# EAGLE board TRV_MRF49_U_V1.1_BF (EAGLE 6.3)
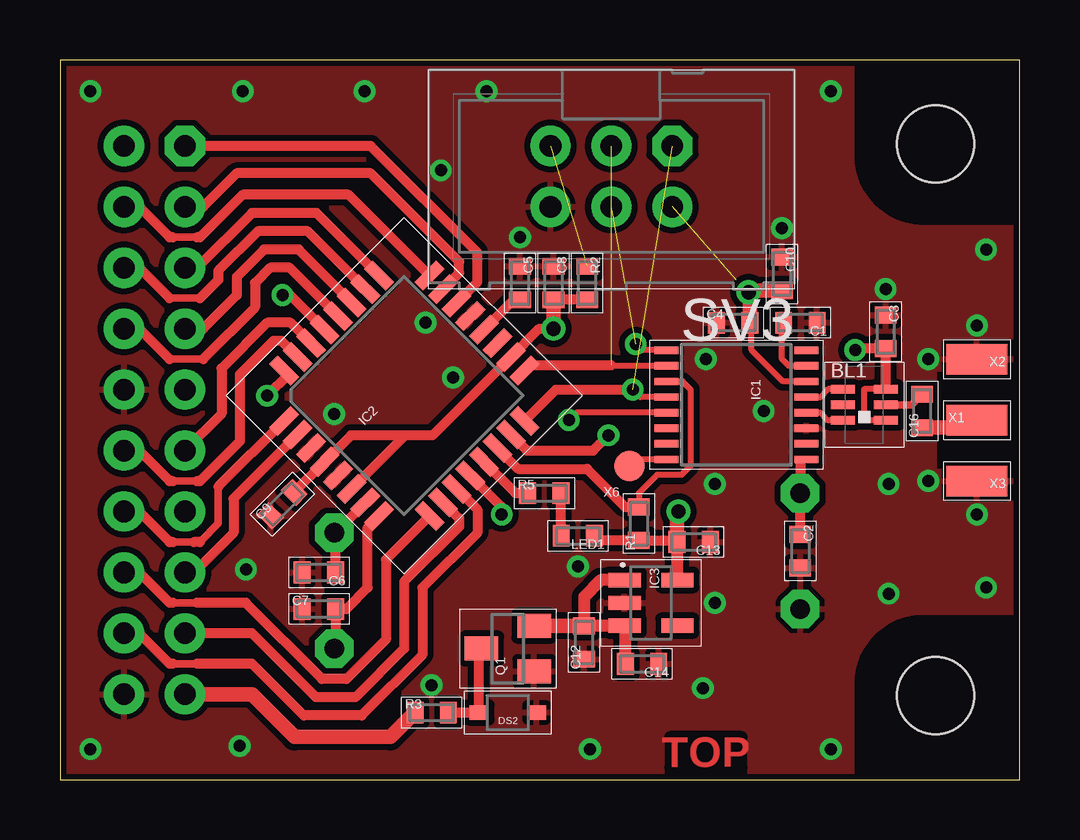
[diagram p0: board, top side]
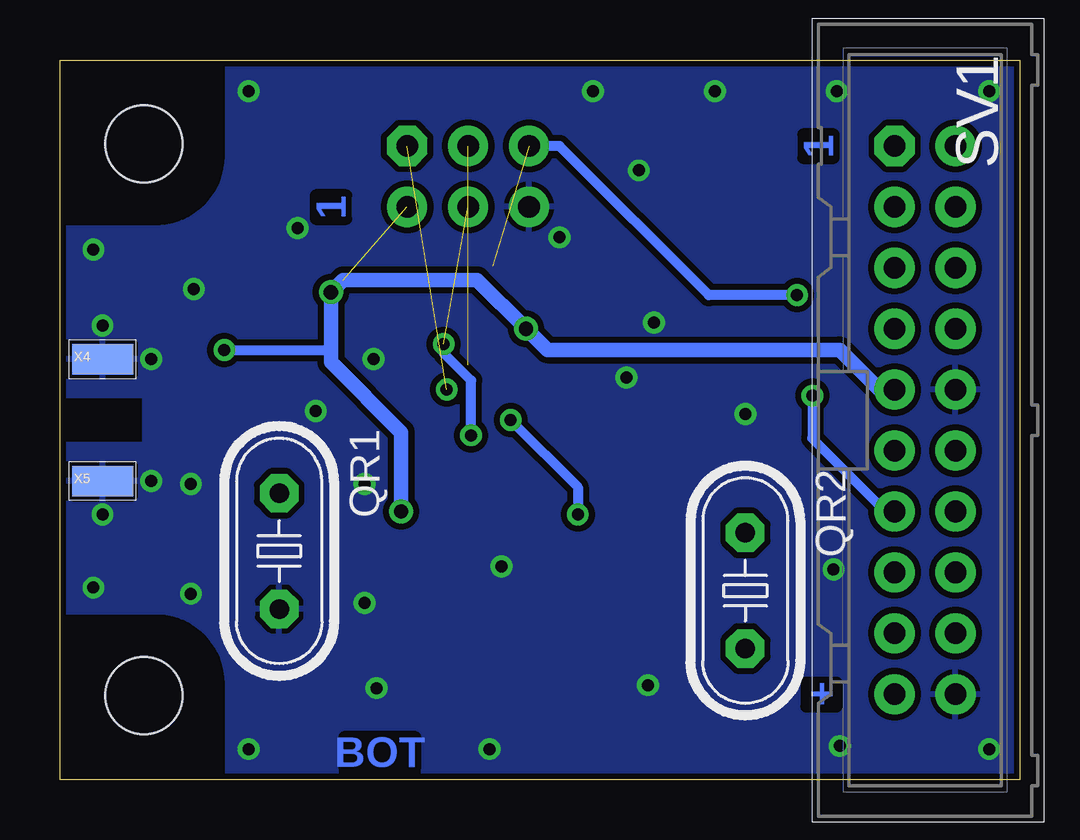
[diagram p1: board, bottom side, seen from below]

Size 40 x 30 mm. Coordinates in mm from the lower left corner, seen from the top.
Outline: 0,0 40,0 40,30 0,30 0,0
Copper layers (1*16): Top 0.035mm / dielectric 1.5mm / Bottom 0.035mm
Design rules "default *": minimum track width 8mil, minimum drill 0.3mm, track to track 10mil, track to pad 10mil, pad to pad 10mil, via to via 10mil, smd to smd 10mil, copper to edge 10mil, drill to drill 8mil, minimum pad ring 5mil, minimum via ring 8mil, stop-mask expansion 4mil, vias tented up to drill 25mil, thermal gap 8mil
Holes 3.2 mm at 36.5,26.5 36.5,3.5

## Footprints (pad centres in the part's own frame; a part is rotated, then mirrored left to right if it is on the bottom)
BL = smd 1 x 0.35: 1 0.9,-0.65; 2 0.9,0; 3 0.9,0.65; 4 -0.9,0.65; 5 -0.9,0; 6 -0.9,-0.65
0603 = smd 0.7 x 0.9: 1 -0.697,0; 2 0.697,0
SOD323 = smd 0.8 x 0.6: A 1.2,0; C -1.2,0
TSSOP16 = smd 0.305 x 0.991: 1 -2.275,-2.918; 2 -1.625,-2.918; 3 -0.975,-2.918; 4 -0.325,-2.918; 5 0.325,-2.918; 6 0.975,-2.918; 7 1.625,-2.918; 8 2.275,-2.918; 9 2.275,2.918; 10 1.625,2.918; 11 0.975,2.918; 12 0.325,2.918; 13 -0.325,2.918; 14 -0.975,2.918; 15 -1.625,2.918; 16 -2.275,2.918
TQFP32-08 = smd 1.27 x 0.5: 1 -4.293,2.8; 2 -4.293,2; 3 -4.293,1.2; 4 -4.293,0.4; 5 -4.293,-0.4; 6 -4.293,-1.2; 7 -4.293,-2; 8 -4.293,-2.8; 17 4.293,-2.8; 18 4.293,-2; 19 4.293,-1.2; 20 4.293,-0.4; 21 4.293,0.4; 22 4.293,1.2; 23 4.293,2; 24 4.293,2.8 | smd 0.5 x 1.27: 9 -2.8,-4.293; 10 -2,-4.293; 11 -1.2,-4.293; 12 -0.4,-4.293; 13 0.4,-4.293; 14 1.2,-4.293; 15 2,-4.293; 16 2.8,-4.293; 25 2.8,4.293; 26 2,4.293; 27 1.2,4.293; 28 0.4,4.293; 29 -0.4,4.293; 30 -1.2,4.293; 31 -2,4.293; 32 -2.8,4.293
SOT23-5 = smd 0.6 x 1.35: 1 -0.95,-1.101; 2 0,-1.101; 3 0.95,-1.101; 4 0.95,1.101; 5 -0.951,1.101
SOT23 = smd 1 x 1.4: 1 -0.95,-1.1; 2 0.95,-1.1; 3 0,1.1
HC49U-V = drill 0.813 pad 1.6 octagon: 1 -2.413,0; 2 2.413,0
ML20 = drill 0.9 pad 1.676 octagon: 1 -11.43,-1.27 | drill 0.9 pad 1.676: 2 -11.43,1.27; 3 -8.89,-1.27; 4 -8.89,1.27; 5 -6.35,-1.27; 6 -6.35,1.27; 7 -3.81,-1.27; 8 -3.81,1.27; 9 -1.27,-1.27; 10 -1.27,1.27; 11 1.27,-1.27; 12 1.27,1.27; 13 3.81,-1.27; 14 3.81,1.27; 15 6.35,-1.27; 16 6.35,1.27; 17 8.89,-1.27; 18 8.89,1.27; 19 11.43,-1.27; 20 11.43,1.27
ML6 = drill 0.9 pad 1.676 octagon: 1 -2.54,-1.27 | drill 0.9 pad 1.676: 2 -2.54,1.27; 3 0,-1.27; 4 0,1.27; 5 2.54,-1.27; 6 2.54,1.27
S2.54/1.27 = smd 1.27 x 2.54: 1 0,0
S1.27R = smd 1.27 x 1.27: 1 0,0

## Placement (x,y rotation side)
BL1  [BL]  33.53,15.62 0 top
C1  4n7  [0603]  30.86,19.05 180 top
C2  n.b.  [0603]  30.86,9.53 270 top
C3  47p  [0603]  34.42,18.67 270 top
C4  100n  [0603]  28.07,19.05 0 top
C5  100n  [0603]  19.18,20.7 270 top
C6  22p  [0603]  10.79,8.64 180 top
C7  22p  [0603]  10.79,7.11 0 top
C8  100n  [0603]  20.57,20.7 270 top
C9  100n  [0603]  9.27,11.48 45 top
C10  1u  [0603]  30.1,21.08 270 top
C12  1u  [0603]  21.84,5.71 90 top
C13  1u  [0603]  26.42,9.91 180 top
C14  100n  [0603]  24.27,4.82 180 top
C16  27p  [0603]  35.94,15.37 90 top
DS2  PESD12VL1BA  [SOD323]  18.67,2.79 180 top
IC1  MRF49XA  [TSSOP16]  28.19,15.62 270 top
IC2  MEGA168PA-AU  [TQFP32-08]  14.35,16 45 top
IC3  LP2992-IM5-3.3  [SOT23-5]  24.64,7.37 270 top
LED1  LEDR  [0603]  21.59,10.16 180 top
Q1  IRLM9301  [SOT23]  18.67,5.46 90 top
QR1  10.000  [HC49U-V]  30.86,9.53 270 bottom
QR2  16.000  [HC49U-V]  11.43,7.87 270 bottom
R1  10k  [0603]  24.13,10.67 90 top
R2  10k  [0603]  21.97,20.7 270 top
R3  0R  [0603]  15.49,2.79 0 top
R5  330R  [0603]  20.19,11.94 0 top
SV1  ISP  [ML20]  3.94,14.99 270 bottom
SV3  ISP  [ML6]  22.99,25.15 180 top
X1  ANT  [S2.54/1.27]  38.23,14.99 270 top
X2  GND  [S2.54/1.27]  38.23,17.53 90 top
X3  GND  [S2.54/1.27]  38.23,12.45 90 top
X4  GND  [S2.54/1.27]  38.23,17.53 270 bottom
X5  GND  [S2.54/1.27]  38.23,12.45 270 bottom
X6  [S1.27R]  23.75,13.08 0 top

## Library data of the parts
BL1 = RF
C1-C10 C12-C14 C16 R1-R3 R5 = RCL
DS2 = Diode
IC1 = Other
IC2 = atmel
IC3 = DCDC
LED1 = Optic
Q1 = Transistor
QR1 QR2 = QUARTZ
SV1 SV3 X1-X6 = Conn

## Nets
+3V3: BL1.1 BL1.3 C3.2 C4.2 C8.2 C9.2 C10.2 C13.2 IC1.14 IC2.4 IC2.6 IC2.18 IC3.5 LED1.1 R1.1 R2.2 SV1.9 SV3.2
CTS: IC2.10 SV1.17
GND: C1.1 C2.2 C3.1 C4.1 C5.1 C6.2 C7.1 C8.1 C9.1 C10.1 C12.1 C13.1 C14.1 DS2.C IC1.11 IC2.3 IC2.5 IC2.21 IC3.2 Q1.1 QR1.2 SV1.10 SV1.20 SV3.6 X2.1 X3.1 X4.1 X5.1
LED: IC2.13 R5.1
MISO: IC1.4 IC2.16 SV3.1
MOSI: IC1.1 IC2.15 SV3.4
N$1: IC1.8 X6.1
N$2: BL1.4 IC1.13
N$3: IC2.22 SV1.1
N$4: C2.1 IC1.9 QR1.1
N$5: DS2.A Q1.3 R3.2
N$6: C5.2 IC2.20
N$7: BL1.6 IC1.12
N$8: BL1.2 C16.2
N$12: C12.2 C14.2 IC3.1 IC3.3 Q1.2
N$18: C6.1 IC2.7 QR2.1
N$19: C7.2 IC2.8 QR2.2
N$21: LED1.2 R5.2
N$23: R3.1 SV1.19
N$25: C16.1 X1.1
PC0: IC2.23 SV1.3
PC1: IC2.24 SV1.4
PC2: IC2.25 SV1.5
PC3: IC2.26 SV1.6
PC4: IC2.27 SV1.7
PC5: IC2.28 SV1.8
PD2: IC2.32 SV1.13
PD3: IC2.1 SV1.14
PD4: IC2.2 SV1.15
PD5: IC2.9 SV1.16
PD7: IC2.11 SV1.18
RIRQ: IC1.5 IC2.12
RSEL: IC1.3 IC2.14 R1.2
RSSI: C1.2 IC1.15
RST: IC2.29 R2.1 SV3.5
RXD: IC2.30 SV1.11
SCK: IC1.2 IC2.17 SV3.3
TXD: IC2.31 SV1.12

## Tracks (layer width: path | path; a pad name or v marks a point on that pad's centre or on a via)
+3V3  (via drill 0.5, 0.6)  (1 unrouted)
  Top 0.254: IC1.14 30.14,16.6 28.83,17.91 28.83,18.98 C4.2 | BL1.1 33.53,14.97 33.53,16.27 BL1.3
  Top 0.305: BL1.3 34.43,16.37 34.42,16.38
  Top 0.406: C9.2 IC2.4 12.13,14.35 14.35,14.35 | 14.35,14.35 15.53,14.35 IC2.18 19.97,18.8 v20.57,18.8 | IC2.6 14.35,14.3 14.35,14.35 | R2.2 C8.2 | LED1.1 22.48,9.97 R1.1 25.65,9.97 C13.2 | 34.42,16.38 C3.2 33.21,17.97 v33.15,17.91
  Top 0.508: C13.2 25.72,8.34 IC3.5
  Top 0.61: C8.2 v20.57,18.8 | C10.2 28.77,20.39 v28.7,20.32 28.76,20.26 C4.2 | C13.2 25.72,11.11 v25.78,11.18
  Bottom 0.406: v33.15,17.91 28.7,17.91
  Bottom 0.61: SV1.9 5.84,16.26 7.49,17.91 19.68,17.91 v20.57,18.8 22.61,20.83 28.19,20.83 v28.7,20.32 28.7,17.91 28.7,17.4 25.78,14.48 v25.78,11.18
CTS
  Top 0.406: IC2.10 16.64,10.89 16.64,10.54 14.35,8.26 14.35,5.46 12.32,3.43 10.67,3.43 8,6.1 SV1.17
GND  (via drill 0.5)
  other vias: 7.75,8.76 21.59,8.89 38.23,18.92 38.23,11.05 22.1,1.27 34.54,12.32 36.2,12.45 36.2,17.53 7.62,28.7 12.7,28.7 17.78,28.7 32.13,28.7 30.1,22.99 38.61,22.1 38.61,8 32.13,1.27 26.8,3.81 34.42,20.45 15.88,25.4 34.54,7.75 15.49,3.94 7.49,1.4 27.3,7.37 27.3,12.32 19.18,22.61 29.34,15.37 26.92,17.53 11.43,15.24 16.38,16.76 15.24,19.05 1.27,28.7 1.27,1.27
  pour Top: 0,0 33,0 33,4 arc-90 36,7 40,7 40.01,12.83 36.45,12.83 36.45,17.14 40,17.14 40,23 36,23 arc-90 33,26 33,30 0,30
  pour Bottom: 0,0 33,0 33,4 arc-90 36,7 40,7 40.01,13.97 36.45,13.97 36.45,16 40,16 40,23 36,23 arc-90 33,26 33,30 0,30
LED
  Top 0.406: IC2.13 18.98,11.94 R5.1
MISO  (via drill 0.5)  (1 unrouted)
  Top 0.254: IC1.4 24.19,15.95 v23.88,16.26
  Top 0.406: IC2.16 20.68,16.26 v23.88,16.26
MOSI  (via drill 0.5)  (1 unrouted)
  Top 0.254: IC1.1 24.27,17.9 v24,18.16
  Top 0.406: IC2.15 19.46,13.72 22.23,13.72 v22.86,14.35
  Bottom 0.406: v22.86,14.35 22.86,16.64 24,17.78 v24,18.16
N$1
  Top 0.254: IC1.8 24.01,13.35 X6.1
N$2
  Top 0.254: IC1.13 31.69,15.95 32.02,16.27 BL1.4
N$3
  Top 0.406: IC2.22 17.4,20.75 17.4,21.97 12.95,26.42 SV1.1
N$4
  Top 0.254: IC1.9 31,13.35 30.86,13.21
  Top 0.406: C2.1 QR1.1 30.86,13.21
N$5
  Top 0.406: R3.2 DS2.A 17.47,5.36 Q1.3
N$6
  Top 0.406: IC2.20 18.92,20 C5.2
N$7
  Top 0.254: IC1.12 31.69,15.3 32.02,14.97 BL1.6
N$8
  Top 0.305: BL1.2 35.5,15.62 C16.2
N$12
  Top 0.406: IC3.1 23.94,8.32
  Top 0.508: C14.2 23.57,6.38 IC3.3 C12.2 21.84,7.62 22.54,8.32 IC3.1
  Top 0.61: C12.2 Q1.2
N$18
  Top 0.406: IC2.7 11.46,10.29 QR2.1 11.49,10.22 C6.1
N$19
  Top 0.406: IC2.8 12.83,10.52 12.83,8 11.94,7.11 C7.2 11.49,5.52 QR2.2
N$21
  Top 0.406: LED1.2 R5.2
N$23
  Top 0.61: SV1.19 8,3.56 9.78,1.78 13.78,1.78 R3.1
N$25
  Top 0.61: C16.1 37.91,14.67 X1.1
PC0
  Top 0.406: IC2.23 16.64,21.12 16.64,21.59 12.95,25.27 7.37,25.27 5.97,23.88 SV1.3
PC1
  Top 0.305: 4.7,22.61 5.71,22.61
  Top 0.406: IC2.24 12.04,24.38 7.62,24.38 5.84,22.61 5.71,22.61 | 4.7,22.61 4.57,22.61 3.3,23.88 SV1.4
PC2
  Top 0.406: SV1.5 5.71,21.34 8,23.62 10.69,23.62 IC2.25
PC3
  Top 0.305: 5.84,20.07 4.57,20.07
  Top 0.406: 4.57,20.07 3.3,21.34 SV1.6 | 5.84,20.07 6.6,20.83 6.6,21.21 8.26,22.86 10.32,22.86 IC2.26
PC4
  Top 0.406: SV1.7 5.97,18.8 7.37,20.19 7.37,20.95 8.51,22.1 9.95,22.1 IC2.27
PC5
  Top 0.305: 5.97,17.53 4.57,17.53
  Top 0.406: 5.97,17.53 8.13,19.68 8.13,20.7 8.76,21.34 9.58,21.34 IC2.28 | 4.57,17.53 3.3,18.8 SV1.8
PD2  (via drill 0.5)
  Top 0.406: IC2.32 9.36,17.06 9.53,16.89 v8.64,16
  Bottom 0.406: v8.64,16 8.64,14.22 5.59,11.18 SV1.13
PD3
  Top 0.305: 6.6,12.21 6.6,10.67 5.84,9.91 | 5.59,9.91 4.7,9.91
  Top 0.406: IC2.1 6.6,12.21 | 5.84,9.91 5.59,9.91 | 4.7,9.91 4.57,9.91 3.3,11.18 SV1.14
PD4
  Top 0.406: IC2.2 7.24,11.72 7.24,10.29 5.59,8.64 SV1.15
PD5
  Top 0.305: 5.71,7.37 4.7,7.37
  Top 0.406: IC2.9 13.59,9.17 13.59,5.84 11.94,4.19 10.92,4.19 7.75,7.37 5.71,7.37 | 4.7,7.37 4.57,7.37 3.3,8.64 SV1.16
PD7
  Top 0.305: 5.71,4.83 4.7,4.83
  Top 0.406: IC2.11 17.4,11.26 17.4,10.29 15.11,8 15.11,5.21 12.57,2.67 10.16,2.67 8,4.83 5.71,4.83 | 4.7,4.83 4.57,4.83 3.3,6.1 SV1.18
RIRQ  (via drill 0.5)
  Top 0.254: IC1.5 21.52,15.3 v21.21,14.99
  Top 0.406: IC2.12 18.41,11.37 v18.41,11.05
  Bottom 0.406: v21.21,14.99 18.41,12.19 v18.41,11.05
RSEL
  Top 0.254: IC1.3 25.95,16.6 26.29,16.26 26.29,13.08 25.91,12.7 24.89,12.7 24.13,11.94 R1.2
  Top 0.406: IC2.14 19.1,12.95 21.97,12.95 23.56,11.37 R1.2
RSSI
  Top 0.254: IC1.15 30.38,17.25 30.1,17.53 30.1,18.98 C1.2
RST  (via drill 0.5)  (1 unrouted)
  Top 0.406: IC2.29 9.59,20.19 v9.27,20.19
  Bottom 0.406: v9.27,20.19 12.95,20.19 19.18,26.42 SV3.5
RXD
  Top 0.406: IC2.30 9.61,19.05 8.64,19.05 6.73,17.14 6.73,15.24 SV1.11
SCK  (1 unrouted)
  Top 0.254: IC1.2 23.01,17.25 22.99,17.27
  Top 0.406: IC2.17 19.58,17.27 22.99,17.27
TXD
  Top 0.305: 5.71,12.45 4.7,12.45
  Top 0.406: IC2.31 9.24,18.29 8.89,18.29 7.49,16.89 7.49,14.1 5.84,12.45 5.71,12.45 | 4.7,12.45 4.57,12.45 3.3,13.72 SV1.12

## Text on the board
Top: TOP
Bottom: 1 | 1 | + | BOT